# Altium PCB PCB1.PcbDoc
Units mm, origin at the board's own origin, x right, y up, seen from the top; angles counter-clockwise.
Board outline 32 x 32 mm, 4 copper layers (Top Layer, GND, POWER, Bottom Layer), stack 0.603 mm thick; 45 components, 36 nets, 190 pads, 105 vias.
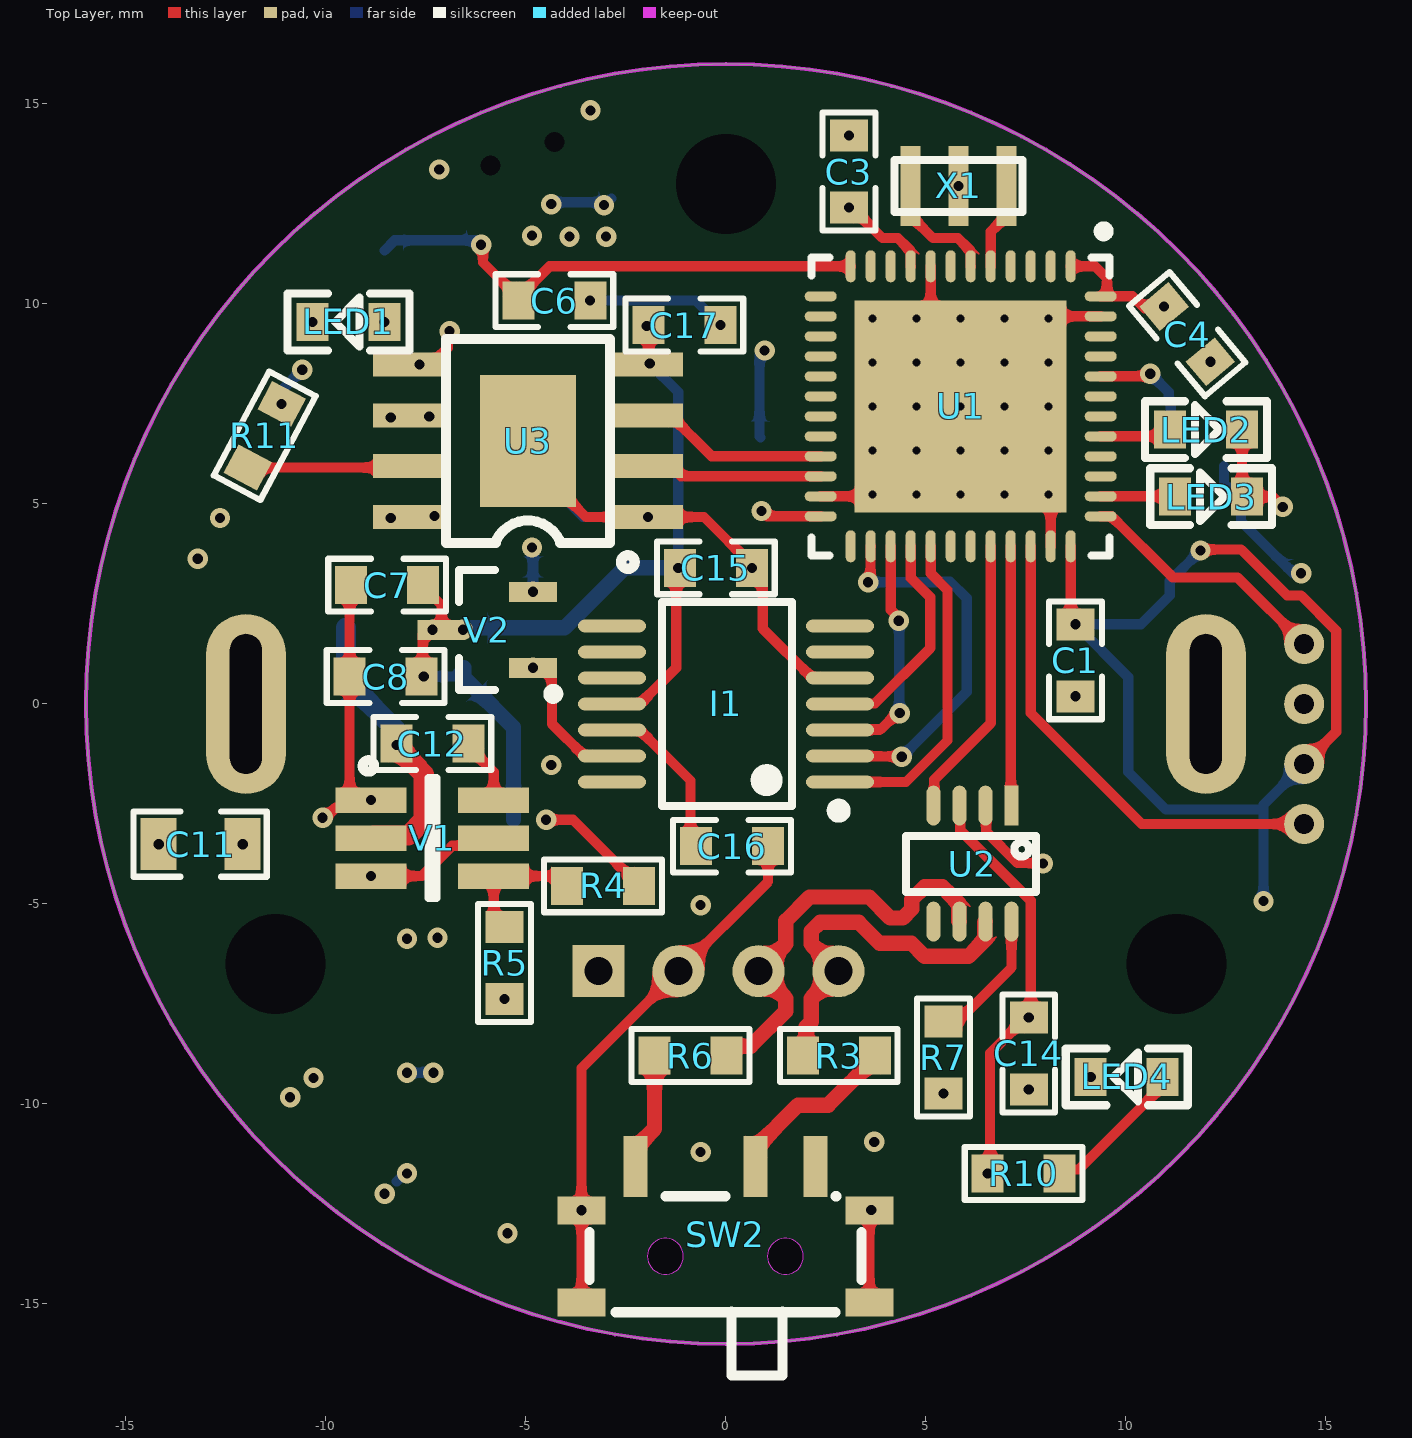
[diagram p0: Top Layer view]
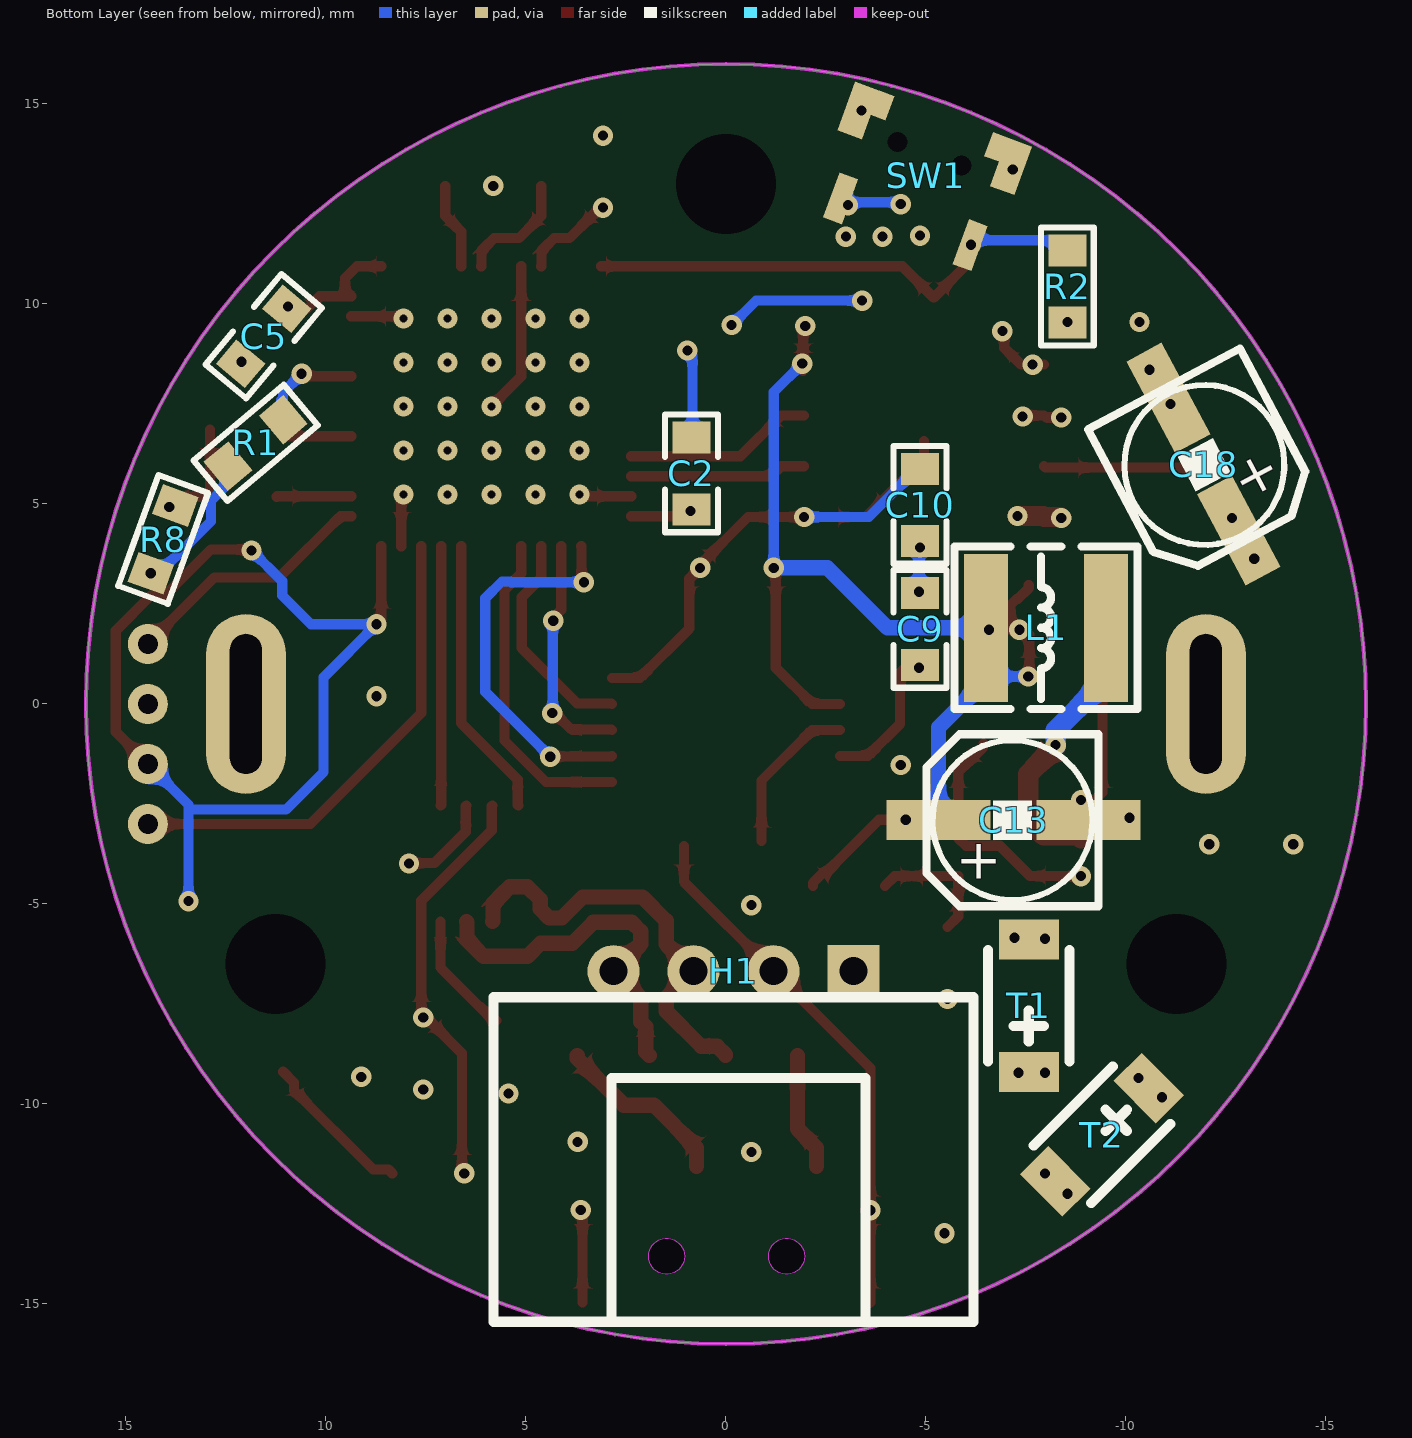
[diagram p1: Bottom Layer view, seen from below]
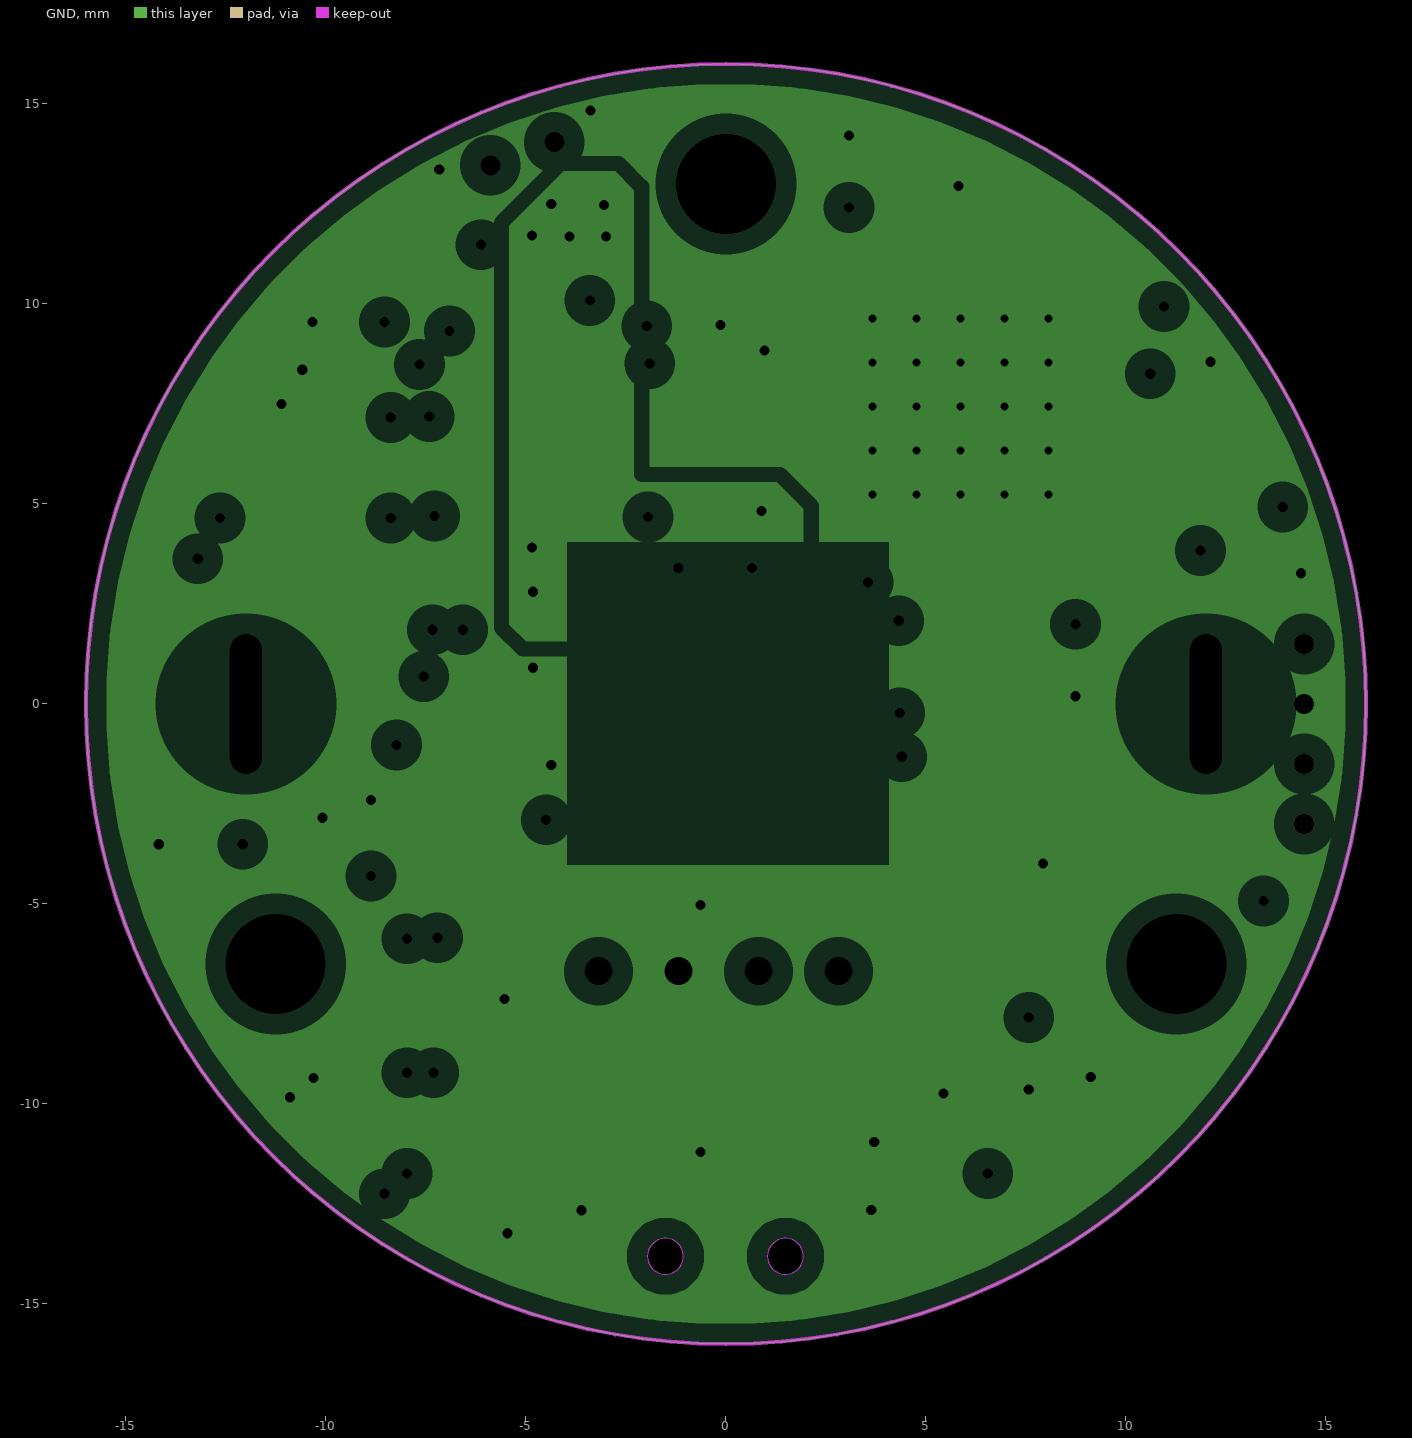
[diagram p2: GND, clearances drawn from the general rule]
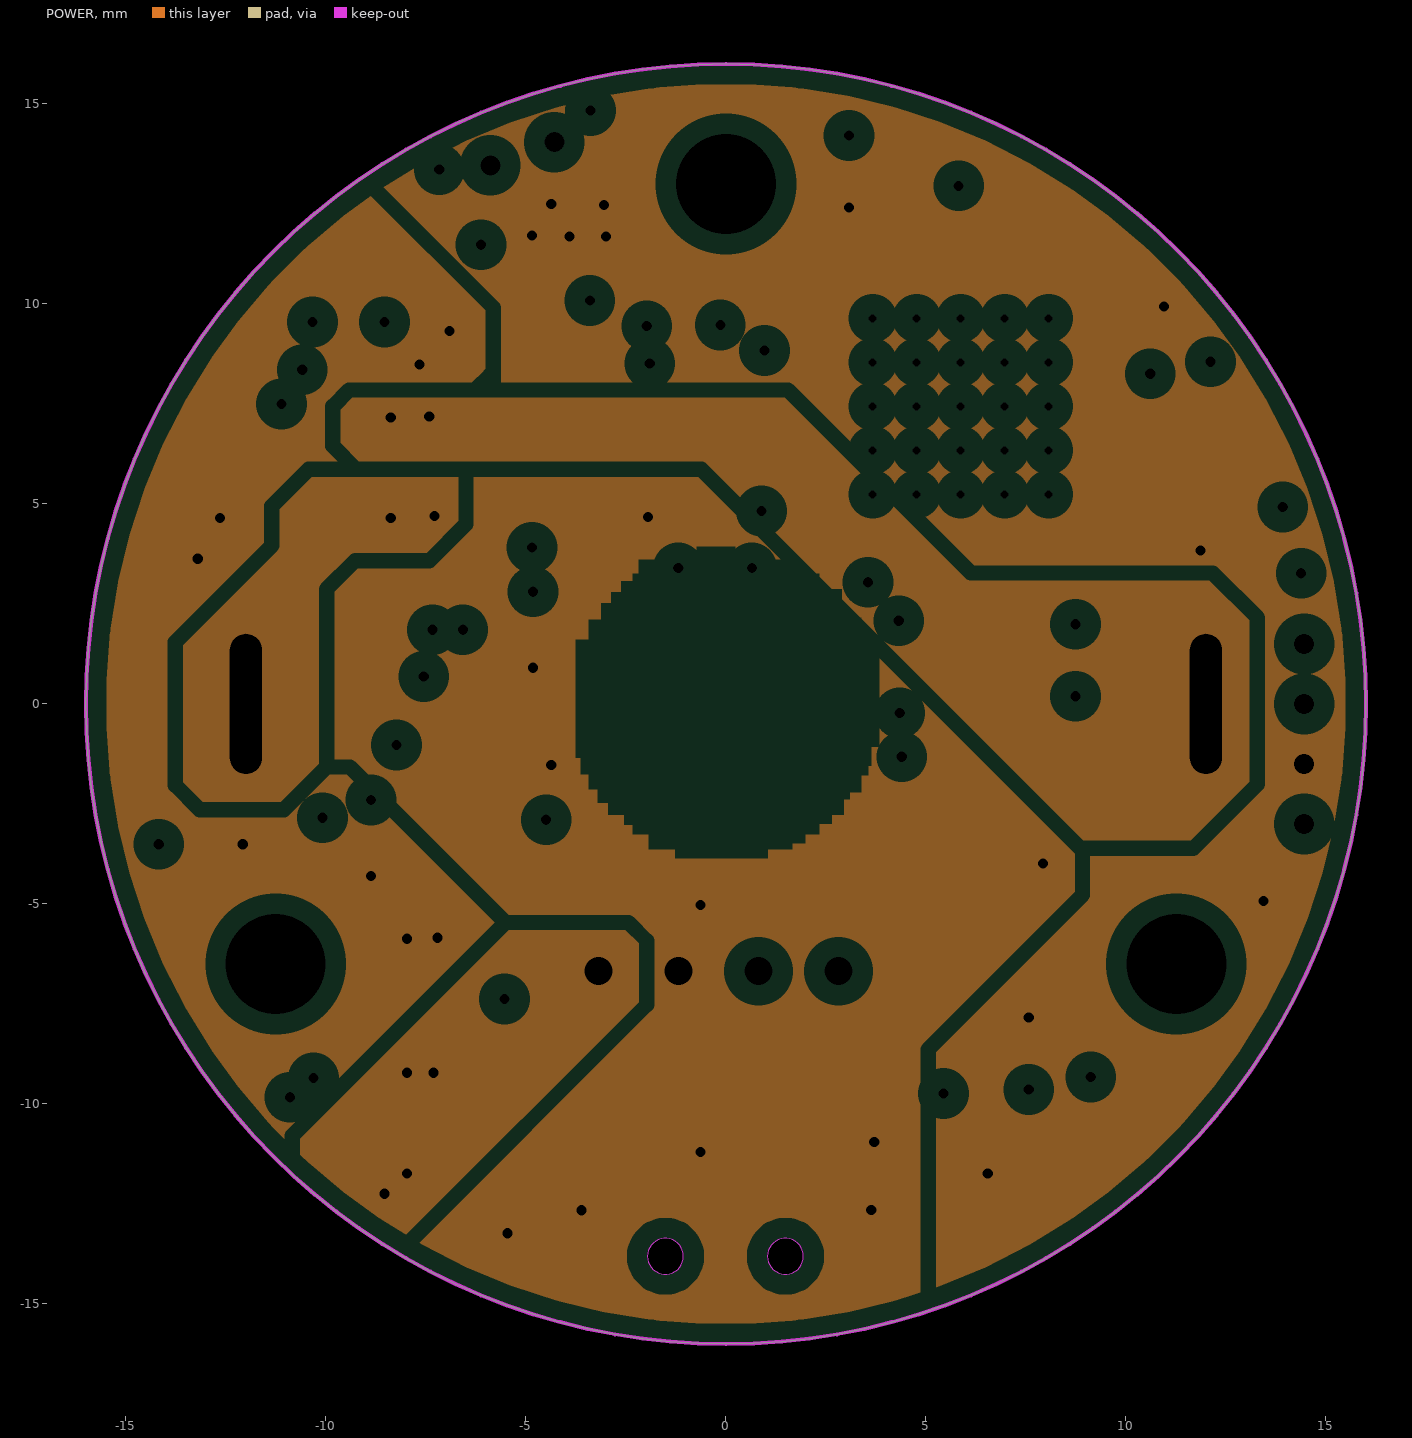
[diagram p3: POWER, clearances drawn from the general rule]
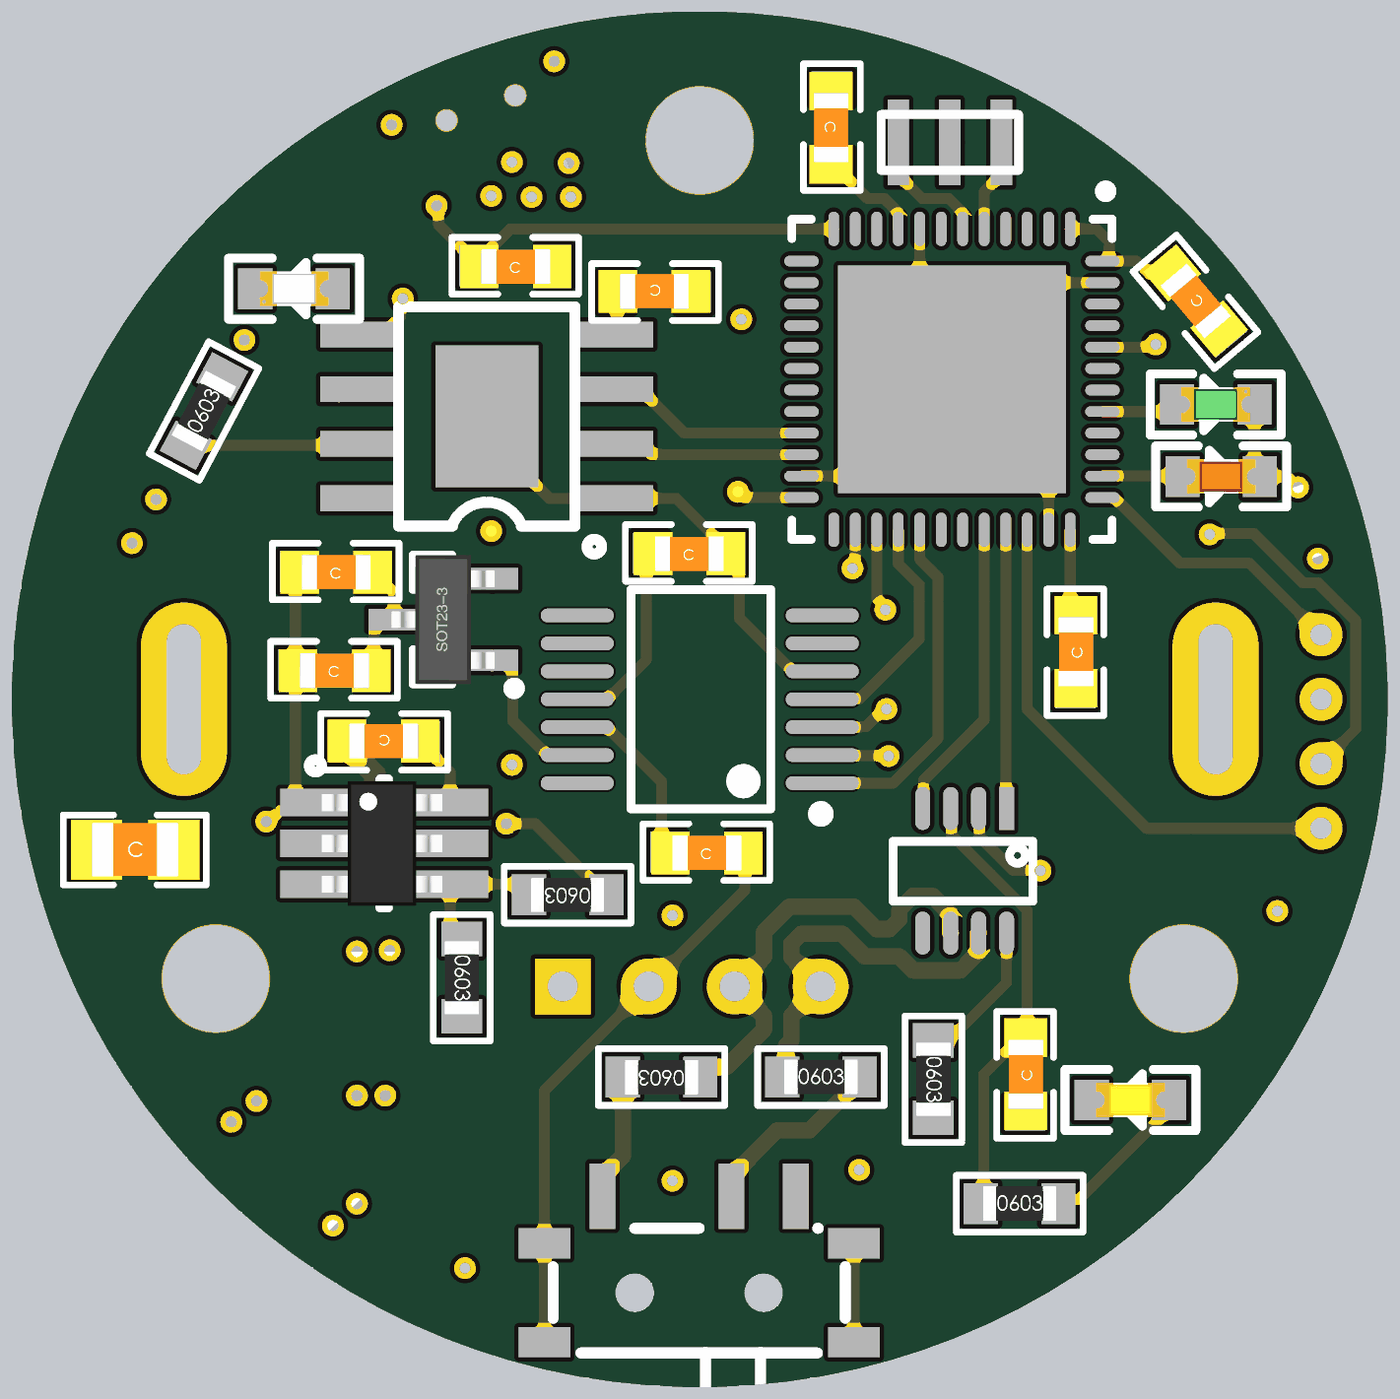
[diagram p4: 3D render of the assembled board from above, using the file's embedded part models]
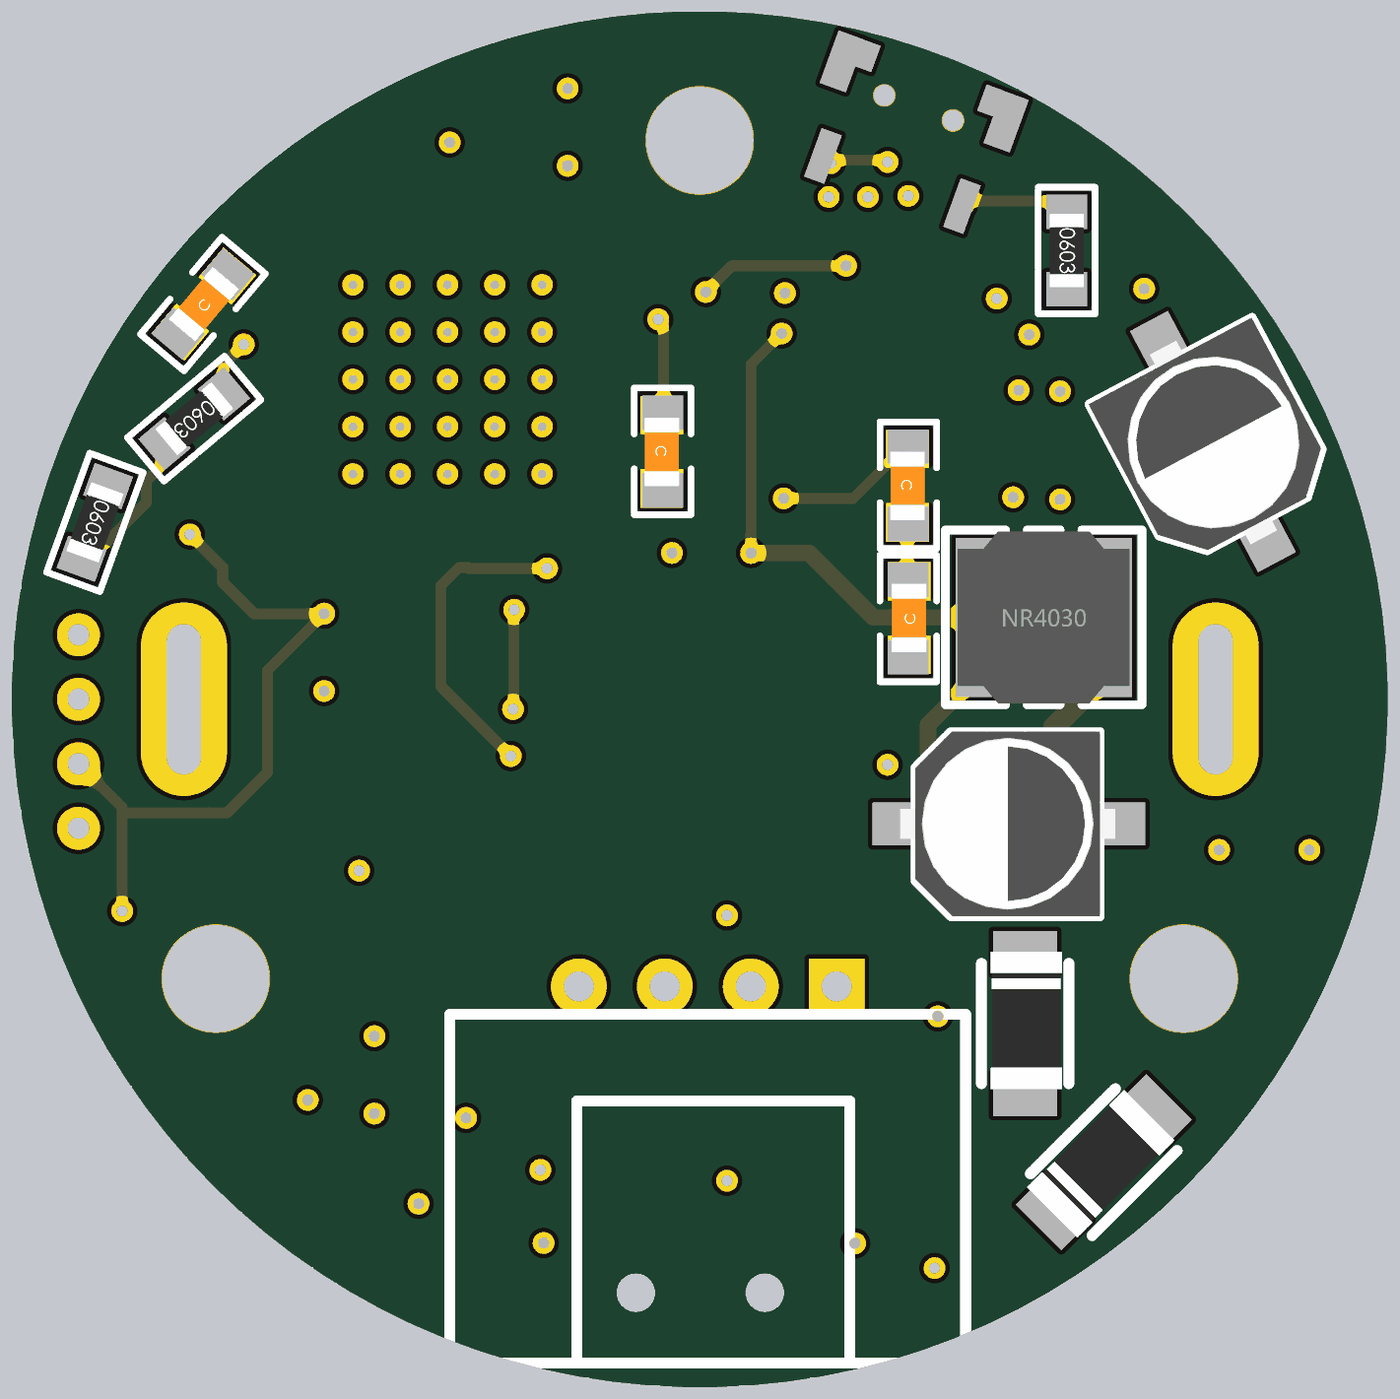
[diagram p5: 3D render of the assembled board from below, using the file's embedded part models]

## Layer stack, top to bottom
Top Solder: solder mask 0.0102, Solder Resist, Dk 3.5
Top Layer: signal copper 0.0356
Dielectric 2: prepreg 0.0711, PP-006, Dk 4.1
GND: plane copper 0.035, net GND
Dielectric 1: dielectric 0.32, FR-4, Dk 4.8
POWER: plane copper 0.035, net (Multiple Nets)
Dielectric 3: prepreg 0.0711, PP-006, Dk 4.1
Bottom Layer: signal copper 0.0356
Bottom Solder: solder mask 0.0102, Solder Resist, Dk 3.5

## Board outline
-16,0 ccw(c0,0) 0,-16 ccw(c0,0) 16,0 ccw(c0,0) 0,16 ccw(c0,0)

## Design rules (kind name [scope] priority, off if disabled: settings)
Clearance [All] p1: gap=0.178 ignorepadtopadclearanceinfootprint=TRUE
DiffPairsRouting [All] p1: maxlimit=0.254 minlimit=0.254 mostfreqgap=0.254 toplayer_minwidth=0.381 toplayer_maxwidth=0.381 toplayer_prefwidth=0.381 bottomlayer_minwidth=0.381 bottomlayer_maxwidth=0.381 bottomlayer_prefwidth=0.381 maxuncoupledlength=12.7
PlaneClearance [All] p1: clearance=0.508
PlaneConnect [All] p1: planeconnectstyle=Direct reliefexpansion=0.508 reliefentries=4 reliefconductorwidth=0.254 reliefairgap=0.254
PolygonConnect [All] p1: connectstyle=Direct reliefconductorwidth=0.254 reliefentries=4 polygonreliefangle="90 Angle" airgapwidth=0.254
RoutingVias [All] p1: holewidth=0.254 width=0.381 viastyle="Through Hole" minholewidth=0.254 minwidth=0.381 maxholewidth=0.711 maxwidth=1.27
SolderMaskExpansion [All] p1: expansion=0.102 istentingtop=FALSE
UnRoutedNet [All] p1: checkbadconnections=TRUE
Width [All] p1: maxlimit=1.27 minlimit=0.254 preferedwidth=0.254 minimp=50.000000 maximp=50.000000 favimp=50.000000
26 further rules are at their usual default settings.

## Classes and differential pairs
differential pair KEY: +KEY_P -KEY_N
differential pair CAN: +CAN_P -CAN_N

## Components (designator, comment, footprint, x,y, rotation, side; value= is the part's Value field where it differs from the comment)
C1 "104" C_0603 8.738,1.092 r90 top
C2 "104" C_0603 0.864,5.766 r270 bottom
C3 "104" C_0603 3.073,13.31 r270 top
C4 "104" C_0603 11.532,9.246 r130 top
C5 "104" C_0603 11.557,9.195 r130 bottom
C6 "104" C_0603 -4.293,10.084 r0 top
C7 "106" C_0603 -8.469,2.972 r0 top
C8 "104" C_0603 -8.509,0.686 r0 top
C9 "106" C_0603 -4.851,1.88 r90 bottom
C10 "104" C_0603 -4.851,4.978 r270 bottom
C11 "105" C_0805 -13.132,-3.505 r0 top
C12 "104" C_0603 -7.341,-0.991 r180 top
C13 "22U" SMD-EC-F4 -7.188,-2.896 r180 bottom
C14 "104" C_0603 7.569,-8.738 r90 top
C15 "104" C_0603 -0.254,3.404 r0 top
C16 "106" C_0603 0.152,-3.556 r0 top
C17 "104" C_0603 -1.041,9.474 r180 top
C18 "10U" SMD-EC-F4 -11.938,5.994 r62 bottom
H1 "HY2.0" HY2.0_4P_插弯 -3.187,-6.68 r0 bottom
I1 "AS5047" TSSOP14 0,0 r180 top locked
L1 "3.3U" NR4030 -8.001,1.905 r180 bottom
LED1 "Y_LED_W" Y_LED_0603_W -7.863,8.839 r180 top
LED2 "Y_LED_G" Y_LED_0603_G 10.428,7.569 r0 top
LED3 "Y_LED_R" Y_LED_0603_R 10.555,5.893 r0 top
LED4 "Y_LED_Y" Y_LED_0603_Y 11.593,-10.033 r180 top
R1 "10K" R_0603 11.76,6.528 r320 bottom
R2 "1K" R_0603 -8.534,10.439 r270 bottom
R3 "60R" R_0603 2.819,-8.788 r0 top
R4 "56.2K" R_0603 -3.073,-4.547 r180 top
R5 "10K" R_0603 -5.537,-6.477 r270 top
R6 "60R" R_0603 -0.889,-8.788 r180 top
R7 "24K" R_0603 5.436,-8.839 r270 top
R8 "5K" R_0603 14.072,4.115 r290 bottom
R10 "1K" R_0603 7.442,-11.735 r0 top
R11 "0.2R" R_0603 -11.532,6.706 r62 top
SW1 "2X4X3.5侧按键" 2X4X3.5贴片侧按开关 -6.298,17.743 r200 bottom
SW2 "MSK12C02" MSK12C02 -2.263,-11.557 r0 top
T1 "SS34" T_DIODE_SOD-123 -7.569,-9.195 r90 bottom
T2 "SS34" T_DIODE_SOD-123 -10.566,-9.601 r315 bottom
U1 "STM32F103CBU6" VFQFPN48_N 5.867,7.442 r270 top
U2 "MAX3051EKA" SOT23-8 7.137,-2.54 r270 top
U3 "AS4950" SOP8-EP -4.953,6.579 r180 top
V1 "TPS56320" SOT23-6 -7.214,-3.327 r0 top
V2 "XC6206P332MR" SOT23-3N -5.969,1.854 r90 top
X1 "8M" XTAL-3.2*1.3MM 5.817,12.954 r0 top

## Footprints (in the part's own frame and the unit in brackets; to place one, negate y for a bottom-side part, rotate by r counter-clockwise, add the part's x,y. Pads: shape width x height; smd on the part's side, far side on the other; paste and mask are expansions set on the pad)
2X4X3.5贴片侧按开关 [mm]
  rect 0.5x1.2 smd: 1(-1.48,-5.97) 2(1.96,-5.96)
  rect 0.65x1.3 smd: 3(-1.81,-3.75) 3(2.25,-3.76)
  rect 0.4x0.65 smd: 3(-1.29,-3.43) 3(1.73,-3.43)
  round 0.2 hole 0.5: 24(-0.62,-4.16) 25(1.08,-4.16)
  body extent 0.24,-5.57 0.24,-5.57, height 0.9
C_0603 [mm] "贴片无极性电容0603封装"
  rect 0.8x0.95 smd: 1(-0.9,0) 2(0.9,0)
  silkscreen extent -1.47,-0.66 1.47,0.66, body extent -1.29,-0.52 1.31,0.48, height 0.89
C_0805 [mm] "贴片无极性电容0805封装"
  rect 0.9x1.3 smd: 1(-1.05,0) 2(1.05,0)
  silkscreen extent -1.68,-0.81 1.65,0.81, body extent -1.5,-0.69 1.5,0.71, height 0.93
HY2.0_4P_插弯 [mm]
  rect 1.3x1.3 hole 0.7: 1(0,0)
  round 1.3 hole 0.7: 2(2,0) 3(4,0) 4(6,0)
  silkscreen extent -3,0.65 9,8.76
MSK12C02 [mm]
  rect 0.6x1.524 smd: 1(0,0) 2(3,0) 3(4.5,0)
  rect 1.2x0.7 smd: 4(-1.35,-3.4) 4(-1.35,-1.1) 4(5.85,-3.4) 4(5.85,-1.1)
  Keep-Out Layer board cut-out: 1.2,-2.25 1.156,-2.055 1.031,-1.898 0.85,-1.811 0.65,-1.811 0.469,-1.898 0.345,-2.055 0.3,-2.25 0.3,-2.25 0.345,-2.445 0.469,-2.602 0.65,-2.689 0.85,-2.689 1.031,-2.602 1.156,-2.445 1.2,-2.25
  Keep-Out Layer board cut-out: 4.2,-2.25 4.156,-2.055 4.031,-1.898 3.85,-1.811 3.65,-1.811 3.469,-1.898 3.345,-2.055 3.3,-2.25 3.3,-2.25 3.345,-2.445 3.469,-2.602 3.65,-2.689 3.85,-2.689 4.031,-2.602 4.156,-2.445 4.2,-2.25
  Multi-Layer pour cut-out: 1.2,-2.25 1.156,-2.055 1.031,-1.898 0.85,-1.811 0.65,-1.811 0.469,-1.898 0.345,-2.055 0.3,-2.25 0.3,-2.25 0.345,-2.445 0.469,-2.602 0.65,-2.689 0.85,-2.689 1.031,-2.602 1.156,-2.445 1.2,-2.25
  Multi-Layer pour cut-out: 4.2,-2.25 4.156,-2.055 4.031,-1.898 3.85,-1.811 3.65,-1.811 3.469,-1.898 3.345,-2.055 3.3,-2.25 3.3,-2.25 3.345,-2.445 3.469,-2.602 3.65,-2.689 3.85,-2.689 4.031,-2.602 4.156,-2.445 4.2,-2.25
  silkscreen extent -1.15,-5.23 5.65,-0.75
NR4030 [mm] "4.0mm*4.0mm*3.0mm(长*宽*高）"
  rect 1.1x3.7 smd: 1(-1.5,0) 2(1.5,0)
  silkscreen extent -2.29,-2.03 2.29,2.03, body extent -2,-2 2,2, height 3.1
R_0603 [mm] "贴片电阻0603封装"
  rect 0.8x0.95 smd: 1(-0.9,0) 2(0.9,0)
  silkscreen extent -1.47,-0.66 1.47,0.66, body extent -0.85,-0.4 0.85,0.4, height 0.53
SMD-EC-F4 [mm]
  rect 2.6x1 smd: 1(-1.877,0) 2(1.877,0)
  silkscreen extent -2.18,-2.16 2.12,2.14, body extent -2.52,-2.15 2.48,2.15, height 5.5
SOP8-EP [mm]
  rect 1.75x0.6 smd: 1(-3,1.905) 2(-3,0.635) 3(-3,-0.635) 4(-3,-1.905) 5(3,-1.905) 6(3,-0.635) 7(3,0.635) 8(3,1.905)
  rect 2.4x3.3 smd: 9(0,0)
  silkscreen extent -2.67,-2.55 2.05,3.2
SOT23-3N [mm]
  rect 0.5x1.2 smd: 1(-0.95,-1.143) 2(0.95,-1.143) 3(0,1.143)
  silkscreen extent -1.72,-1.78 1.5,0.7, body extent -1.5,-1.2 1.5,1.2, height 1.05
SOT23-6 [mil]
  rect 70x25 smd: 1(-65.35,36.4) 2(-65.35,-1) 3(-65.35,-38.4) 4(55.35,-38.4) 5(55.35,-1) 6(55.35,36.4)
  silkscreen extent -74,-60 -1,76, body extent -62,-58 48,56, height 57
SOT23-8 [mm]
  rect 1x0.35 smd: 1(0,0)
  oval 1x0.35 smd: 2(0,-0.65) 3(0,-1.3) 4(0,-1.95) 5(2.9,-1.95) 6(2.9,-1.3) 7(2.9,-0.65) 8(2.9,0)
  silkscreen extent 0.76,-2.64 2.16,0.61
T_DIODE_SOD-123 [mm] "贴片二极管SOD-123封装"
  rect 1x1.5 smd: 1(0,0) 2(3.302,0)
  silkscreen extent 0.25,-1.02 3.05,1.02, body extent 0.13,-0.86 3.33,0.8, height 0.53
TSSOP14 [mm]
  oval 1.7x0.32 smd paste+0 mask+0.05: 1(-2.85,1.95) 2(-2.85,1.3) 3(-2.85,0.65) 4(-2.85,0) 5(-2.85,-0.65) 6(-2.85,-1.3) 7(-2.85,-1.95) 8(2.85,-1.95) 9(2.85,-1.3) 10(2.85,-0.65) 11(2.85,0) 12(2.85,0.65) 13(2.85,1.3) 14(2.85,1.95)
  silkscreen extent -2.97,-2.55 1.6,2.82
VFQFPN48_N [mm] "QFN, 48-Leads, Body 7x7mm, Pitch 0.5mm, Thermal Pad 5.3x5.3mm, IPC Medium Density"
  oval 0.8x0.25 smd: 1(-3.5,2.75) 2(-3.5,2.25) 3(-3.5,1.75) 4(-3.5,1.25) 5(-3.5,0.75) 6(-3.5,0.25) 7(-3.5,-0.25) 8(-3.5,-0.75) 9(-3.5,-1.25) 10(-3.5,-1.75) 11(-3.5,-2.25) 12(-3.5,-2.75) 25(3.5,-2.75) 26(3.5,-2.25) 27(3.5,-1.75) 28(3.5,-1.25) 29(3.5,-0.75) 30(3.5,-0.25) 31(3.5,0.25) 32(3.5,0.75) 33(3.5,1.25) 34(3.5,1.75) 35(3.5,2.25) 36(3.5,2.75)
  oval 0.25x0.8 smd: 13(-2.75,-3.5) 14(-2.25,-3.5) 15(-1.75,-3.5) 16(-1.25,-3.5) 17(-0.75,-3.5) 18(-0.25,-3.5) 19(0.25,-3.5) 20(0.75,-3.5) 21(1.25,-3.5) 22(1.75,-3.5) 23(2.25,-3.5) 24(2.75,-3.5) 37(2.75,3.5) 38(2.25,3.5) 39(1.75,3.5) 40(1.25,3.5) 41(0.75,3.5) 42(0.25,3.5) 43(-0.25,3.5) 44(-0.75,3.5) 45(-1.25,3.5) 46(-1.75,3.5) 47(-2.25,3.5) 48(-2.75,3.5)
  rect 5.3x5.3 smd: 49(0,0)
  silkscreen extent -4.5,-3.72 3.72,3.73, body extent -3.58,-3.57 3.57,3.58, height 1
XTAL-3.2*1.3MM [mm]
  rect 0.5x2 smd: 1(-1.2,0) 2(0,0) 3(1.2,0)
  silkscreen extent -1.6,-0.65 1.6,0.65
Y_LED_0603_G [mm] "绿色贴片0603LED"
  rect 0.8x0.95 smd: 1(0.675,-0.711) 2(2.475,-0.711)
  silkscreen extent 0.05,-1.42 3.1,0, body extent 0.77,-1.11 2.37,-0.31, height 0.6
Y_LED_0603_R [mm] "红色贴片0603LED"
  rect 0.8x0.95 smd: 1(0.675,-0.711) 2(2.475,-0.711)
  silkscreen extent 0.05,-1.42 3.1,0, body extent 0.77,-1.11 2.37,-0.31, height 0.6
Y_LED_0603_W [mm] "白色贴片0603LED"
  rect 0.8x0.95 smd: 1(0.675,-0.711) 2(2.475,-0.711)
  silkscreen extent 0.05,-1.42 3.1,0, body extent 0.77,-1.11 2.37,-0.31, height 0.6
Y_LED_0603_Y [mm] "黄色贴片0603LED"
  rect 0.8x0.95 smd: 1(0.675,-0.711) 2(2.475,-0.711)
  silkscreen extent 0.05,-1.42 3.1,0, body extent 0.77,-1.11 2.37,-0.31, height 0.6

## Part data
C1 C2 C3 C4 C5 C6 C7 C8 C9 C10 C11 C12 C14 C15 C16 C17: library part C_无极贴片, "无极性贴片电容"
C13 C18: library part C_贴片电解, "贴片电解电容"
H1: library part HY2.0_4P
I1: "磁编码器芯片"
L1: library part L_贴片功率, "贴片屏蔽式功率电感"
LED1: "白色LED"
LED2: "绿色LED"
LED3: "红色LED"
LED4: "黄色LED"
R1 R2 R3 R4 R5 R6 R7 R8 R10 R11: library part R_贴片, "贴片电阻"
SW2: "单刀双掷开关，卧贴，额定电流：50mA，额定电压：12V"
T1 T2: library part T_Sch_Diode_SSXX, "SSXX系列肖特基二极管", LatestRevisionDate=17-Jul-2002, LatestRevisionNote="Re-released for DXP Platform.", Publisher="Altium Limited"
U1: "STM32 ARM-based 32-bit MCU Performance Line with 128 kB Flash, 20 kB Internal RAM, -40 to +85癈 Temperature, 48-Pin VFQFPN, Tray", ComponentLink1Description="Manufacturer URL", ComponentLink1URL=http://www.st.com/, ComponentLink2Description="STM32F103 Datasheet", ComponentLink2URL=http://www.st.com/internet/com/TECHNICAL_RESOURCES/TECHNICAL_LITERATURE/DATASHEET/CD00161566.pdf, ComponentLink3Description="STM32 Family Web Page", ComponentLink3URL=www.st.com/stm32, DatasheetVersion="rev13.0, Apr-2011", PackageDescription="48-Pin Quad Flat No-Lead, 7 x 7 x 0.9 mm Body, 0.5 mm Pitch, Exposed Pad", PackageReference=VFQFPN48, PackageVersion=2011
U2: "CAN-1Mbps"
U3: "直流电机驱动，3A"
V1: "小封装3A开关电源"
V2: "低压差线性稳压芯片", BOM名称=低压差线性稳压芯片, 学习资源=www.ooocke.com, 版权归属=源创客
X1: library part XTAL-3213-3P, "8~20M-3.2*1.3mm-3P"

## Free pads (board coordinates)
  oval 2x4.5 hole 3.5 slot 0.8 at 0 deg: 8(-12,0) 9(12,0)
  round 2 hole 2.5: 10(0,13) 11(-11.26,-6.5) 12(11.26,-6.5)
  round 1 hole 0.5: 13(14.453,-3.001) 17(14.453,-1.501) 18(14.453,-0.001) 19(14.453,1.499)

## Via types
v1: diameter 0.508, hole 0.254, Top Layer to Bottom Layer, 80 vias
v2: diameter 0.5, hole 0.2, Top Layer to Bottom Layer, 25 vias

## Nets (pads, with @x,y where several pads share a name; then routed paths per layer and width w, separated by ;. In a path a pad name is that pad's centre, name@x,y a point inside that pad or via, vN(x,y) a via of type N, cw(c..) or ccw(c..) an arc to the next point about the centre after c; other vN are vias at no path point)
3V3: C1.2 C2.2 C3.2 C4.2 C5.2 C9.2 C10.2 C14.2 pad.17 R10.1 SW1.1 U1.1 U1.9 U1.24 U1.36 U1.48 U2.3 V2.2 | length 46.1
  Top Layer w0.254: v1(0.889,4.826) 1.023,4.692 U1.24 ; v1(3.073,12.41) 3.148,12.41 3.909,11.649 4.293,11.649 4.615,11.327 4.615,10.944 U1.9 ; U2.3 5.856,-2.558 5.856,-3.155 7.617,-4.916 7.617,-7.79 v1(7.569,-7.838) 7.494,-7.838 6.604,-8.728 6.604,-11.673 v1(6.542,-11.735) ; U1.36 8.617,2.112 v1(8.738,1.992) ; U1.1 9.225,10.942 9.525,10.643 9.525,10.287 9.449,10.211 U1.48@9.467,10.192 ; U1.48 U1.48@9.467,10.192 ; v1(10.953,9.935) 10.905,9.887 10.462,9.887 10.157,10.192 U1.48@9.467,10.192 ; v1(11.862,3.835) 11.887,3.861 12.878,3.861 14.028,2.71 14.379,2.71 15.257,1.832 15.257,-0.697 pad.17
  Bottom Layer w0.254: v1(-4.851,3.912) -4.826,3.886 v1(-4.826,2.804) ; v1(-4.369,12.497) -4.32,12.545 -2.959,12.545 SW1.1 ; v1(11.862,3.835) 11.094,3.067 11.094,2.712 10.374,1.992 v1(8.738,1.992) 10.058,0.671 10.058,-1.702 10.998,-2.642 13.437,-2.642 ; v1(13.437,-4.928) 13.437,-2.517 pad.17@14.43,-1.524
  other v1: -3.912,11.684 -2.997,11.684 -4.851,11.709 -3.048,12.471
5V: C7.2 C8.2 C13.1 C15.1 C17.2 I1.11 L1.1 R4.1 U3.4 V2.3 | length 28.3
  Top Layer w0.254: C8.2 -7.585,0.71 -7.585,1.731 -7.462,1.854 V2.3 -7.112,2.475 -7.261,2.624 -7.296,2.624 -7.569,2.897 C7.2 ; v1(-4.496,-2.896) -3.824,-2.896 -2.521,-4.199 -2.446,-4.199 -2.173,-4.472 R4.1 ; I1.11 -2.153,0 -1.245,0.908 C15.1@-1.245,3.404 ; C17.2 -1.928,9.46 U3.4@-1.928,8.331
  Bottom Layer w0.254: v1(-7.556,0.689) -6.778,0.689 L1.1@-6.553,0.914 ; v1(-1.905,8.509) -1.194,7.798 v1(-1.194,3.404)
  Bottom Layer w0.381: L1.1@-6.553,0.914 -6.553,0.657 -5.312,-0.584 C13.1 ; L1.1 -4.039,1.905 -2.54,3.404 v1(-1.194,3.404)
  other v1: -7.335,1.854 -6.579,1.854 -1.981,9.449
12V: C11.2 C18.1 T1.2 U3.5 V1.3 V1.5 | length 5.1
  Top Layer w0.254: v1(-8.874,-4.303) -7.604,-4.303 -6.844,-3.543 -5.998,-3.543 V1.5 ; U3.5 -7.378,8.484 -6.957,8.904 -6.957,9.273 v1(-6.909,9.322)
  other v1: -7.976,-5.867 -7.214,-5.842 -12.082,-3.505 -13.208,3.632 -12.649,4.648 -7.665,8.484
CAN_N: H1.3 R6.1 U2.6 | length 10.7
  Top Layer w0.381: R6.1 0.011,-8.766 0.221,-8.556 0.618,-8.556 1.495,-7.679 1.495,-7.363 H1.3 1.495,-5.998 1.495,-5.419 2.09,-4.824 3.582,-4.824 4.105,-5.347 4.421,-5.347 4.644,-5.124 4.644,-4.89 4.962,-4.572 5.412,-4.572 5.822,-4.981 5.822,-5.425 U2.6
CAN_P: H1.4 R3.1 U2.7 | length 9.2
  Top Layer w0.381: R3.1 2.006,-8.702 2.006,-8.066 2.13,-7.942 2.13,-7.363 H1.4 2.13,-5.998 2.13,-5.682 2.353,-5.459 3.319,-5.459 3.842,-5.982 4.636,-5.982 4.962,-6.308 6.062,-6.308 6.472,-5.899 6.472,-5.455 U2.7
CANRX: U1.32 U2.4 | length 7.1
  Top Layer w0.254: U2.4 5.206,-2.522 5.206,-1.89 6.617,-0.479 U1.32
CANTX: U1.33 U2.1 | length 6.5
  Top Layer w0.254: U1.33 7.119,3.94 7.119,-2.522 U2.1
CLK: pad.19 U1.37 | length 6.4
  Top Layer w0.254: U1.37 9.638,4.692 11.165,3.166 12.785,3.166 pad.19
DIO: pad.13 U1.34 | length 12.2
  Top Layer w0.254: U1.34 7.617,-0.226 10.393,-3.001 pad.13
ERRLED: LED3.1 U1.38 | length 1.9
  Top Layer w0.254: U1.38 11.22,5.192 LED3.1
GND: C1.1 C2.1 C3.1 C4.1 C5.1 C6.2 C7.1 C8.1 C9.1 C10.1 C11.1 C13.2 C14.1 C15.2 C16.2 C17.1 C18.2 H1.2 I1.5 I1.13 LED1.2 LED4.2 pad.18 R1.2 R5.2 R7.2 R8.2 R11.2 SW1.3 SW2.4 T2.1 U1.8 U1.23 U1.35 U1.47 U1.49 U2.2 U3.1 U3.9 V1.1 V2.1 X1.2 | length 61.6
  Top Layer w0.254: v1(-10.084,-2.845) -10.015,-2.845 -9.764,-2.593 -9.064,-2.593 v1(-8.874,-2.403) -9.219,-2.403 -9.409,-2.212 C8.1 -9.409,2.932 C7.1 ; U3.9 -4.953,6.129 -3.498,4.674 v1(-1.953,4.674) -0.549,4.674 0.646,3.479 v1(0.646,3.404) 0.919,3.131 0.919,1.884 2.153,0.65 I1.5 ; v1(-4.826,0.904) -4.476,0.904 -4.353,0.781 -4.353,-0.494 -3.547,-1.3 I1.13 ; SW2.4@-3.613,-14.957 v1(-3.613,-12.657) -3.613,-9.106 H1.2 1.052,-4.441 C16.2 ; U1.23 3.617,5.192 v2(3.667,5.242) ; SW2.4@3.586,-14.957 SW2.4@3.586,-12.657 ; U1.8 5.117,8.192 v2(5.867,7.442) ; U2.2 6.506,-2.558 6.506,-3.194 7.29,-3.978 7.915,-3.978 v1(7.925,-3.988) ; v2(8.067,5.242) 8.117,5.192 U1.35 ; v2(8.067,9.642) 8.117,9.692 U1.47
  Bottom Layer w0.254: C18.2 -11.057,7.891 v1(-10.592,8.357) ; C10.1 -4.776,5.878 -3.572,4.674 v1(-1.953,4.674) ; v1(-3.404,10.084) -0.751,10.084 v1(-0.141,9.474) ; C2.1 0.838,6.691 0.838,8.643 0.965,8.77 v1(0.965,8.839) ; R1.2 12.45,5.509 12.876,5.083 12.876,4.57 14.176,3.269 v1(14.379,3.269)
  other v1: -5.461,-13.233 3.632,-12.649 -0.635,-11.201 3.708,-10.947 -10.897,-9.83 5.436,-9.739 7.569,-9.638 -10.312,-9.347 9.119,-9.322 -5.537,-7.377 -0.635,-5.029 -14.182,-3.505 -4.369,-1.524 8.738,0.192 -11.109,7.5 12.11,8.556 -10.338,9.55 5.817,12.954 -7.168,13.361 3.073,14.21 -3.387,14.84
  other v2: 4.767,5.242 5.867,5.242 6.967,5.242 3.667,6.342 4.767,6.342 5.867,6.342 6.967,6.342 8.067,6.342 3.667,7.442 4.767,7.442 6.967,7.442 8.067,7.442 3.667,8.542 4.767,8.542 5.867,8.542 6.967,8.542 8.067,8.542 3.667,9.642 4.767,9.642 5.867,9.642 6.967,9.642
IDLED: LED2.1 U1.41 | length 1.8
  Top Layer w0.254: U1.41 10.937,6.692 LED2.1
IN1: U1.21 U3.3 | length 4.7
  Top Layer w0.254: U3.3 -1.378,7.214 -0.357,6.192 U1.21
IN2: U1.22 U3.2 | length 4.4
  Top Layer w0.254: U3.2 -1.378,5.944 -1.127,5.692 U1.22
KEY: C6.1 R2.1 SW1.2 U1.12 | length 12.9
  Top Layer w0.254: v1(-6.121,11.481) -6.073,11.432 -6.073,11.039 -5.193,10.159 -4.409,10.942 U1.12
  Bottom Layer w0.254: R2.1 -8.282,11.592 -6.233,11.592 v1(-6.121,11.481) -6.113,11.472 SW1.2
KEY_N: R6.2 SW2.1 | length 3
  Top Layer w0.381: SW2.1 -2.263,-11.095 -1.789,-10.621 R6.2
KEY_P: R3.2 SW2.2 | length 4.4
  Top Layer w0.381: SW2.2 0.737,-11.095 1.802,-10.029 2.554,-10.029 3.719,-8.863 R3.2
MISO: I1.3 U1.27 | length 5.9
  Top Layer w0.254: I1.3 2.863,-0.637 3.866,-0.637 4.275,-0.229 v1(4.343,-0.229) ; U1.27 4.117,2.352 4.318,2.152 v1(4.318,2.083)
  Bottom Layer w0.254: v1(4.318,2.083) 4.331,2.07 4.331,-0.216 v1(4.343,-0.229)
MOSI: I1.4 U1.28 | length 5.6
  Top Layer w0.254: I1.4 2.863,0.013 3.721,0.013 5.105,1.397 5.105,2.667 4.617,3.155 U1.28
NetC12_1: C12.1 V1.6 | length 1.7
  Top Layer w0.254: C12.1 -6.441,-1.066 -5.808,-1.699 V1.6
NetC16_1: C16.1 I1.12 | length 4
  Top Layer w0.254: I1.12 -2.153,-0.65 -0.889,-1.914 C16.1@-0.889,-3.429
NetLED1_1: LED1.1 R2.2
  other v1: -8.538,9.55
NetLED2_2: LED2.2 LED3.2 R8.1 | length 2.7
  Top Layer w0.254: LED2.2 12.903,5.309 LED3.2 13.665,5.182 v1(13.919,4.928)
NetLED4_1: LED4.1 R10.2 | length 3.9
  Top Layer w0.254: R10.2 8.443,-11.634 8.825,-11.634 10.798,-9.661 10.798,-9.468 LED4.1@11.071,-9.195
NetR1_1: R1.1 U1.44 | length 2.6
  Top Layer w0.254: U1.44 10.477,8.192 10.54,8.255 v1(10.608,8.255)
  Bottom Layer w0.254: v1(10.608,8.255) 11.071,7.792 11.071,7.645 11.119,7.597 11.119,7.155 R1.1
NetR7_1: R7.1 U2.8 | length 3.1
  Top Layer w0.254: R7.1@5.74,-7.914 5.815,-7.914 7.137,-6.592 U2.8
NetR11_1: R11.1 U3.7 | length 4
  Top Layer w0.254: R11.1 R11.1 -7.987,5.91 U3.7
NetU1_5: U1.5 X1.3 | length 2.2
  Top Layer w0.254: U1.5 6.617,11.805 7.017,12.204 X1.3
NetU1_6: U1.6 X1.1 | length 3
  Top Layer w0.254: X1.1 4.617,12.204 5.171,11.649 5.793,11.649 6.115,11.327 6.115,10.944 U1.6
OUT1: pad.9 U3.6 | length 1
  Top Layer w0.254: v1(-8.382,7.163) -8.004,7.163 U3.6 -7.442,7.214 v1(-7.417,7.188)
OUT2: pad.8 U3.8 | length 1.1
  Top Layer w0.508: v1(-8.382,4.648) -8.357,4.674 U3.8 -7.928,4.699 v1(-7.29,4.699)
SPICLK: I1.2 U1.26 | length 9.8
  Top Layer w0.254: I1.2 2.86,-1.31 4.384,-1.31 v1(4.394,-1.321) ; v1(3.553,3.045) 3.553,3.113 3.615,3.176 3.615,3.94 U1.26
  Bottom Layer w0.254: v1(3.553,3.045) 4.491,3.045 5.371,3.045 5.391,3.064 5.601,3.064 6.02,2.645 6.02,0.305 v1(4.394,-1.321)
SPICS: I1.1 U1.29 | length 8.1
  Top Layer w0.254: I1.1 4.502,-1.95 5.537,-0.914 5.537,2.846 5.117,3.266 U1.29
SW: C12.2 L1.2 V1.2 | length 7.2
  Top Layer w0.508: V1.2 -8.81,-3.289 -7.943,-3.289 -7.553,-2.899 -7.553,-1.753 -8.241,-1.066 v1(-8.241,-1.028) C12.2
  Bottom Layer w0.508: L1.2 -9.501,0.605 -8.241,-0.655 v1(-8.241,-1.028)
VBAT: H1.1 T1.1 T2.2 | length 0.8
  Bottom Layer w0.254: T2.2 -8.03,-11.735 v1(-7.976,-11.735) ; v1(-7.976,-9.22) -7.595,-9.22 T1.1
  other v1: -8.534,-12.243 -7.315,-9.22
VFB: R4.2 R5.1 V1.4 | length 3.3
  Top Layer w0.254: R5.1 -5.808,-5.307 V1.4 -4.217,-4.303 R4.2
pads on no net: I1.6 I1.7 I1.8 I1.9 I1.10 I1.14 SW1.24 SW1.25 SW2.3 U1.2 U1.3 U1.4 U1.7 U1.10 U1.11 U1.13 U1.14 U1.15 U1.16 U1.17 U1.18 U1.19 U1.20 U1.25 U1.30 U1.31 U1.39 U1.40 U1.42 U1.43 U1.45 U1.46 U2.5

## Polygon pours and split planes (outlines as drawn)
3V3 on GND (split plane): -2.3,12.849 -2.3,11.811 -2.3,5.74 -2.294,5.691 -2.275,5.644 -2.244,5.605 -2.204,5.574 -2.158,5.555 -2.108,5.548 1.267,5.548 1.941,4.873 1.941,4.039 -3.962,4.039 -3.962,1.564 -5,1.564 -5.421,1.985 -5.421,4.902 -5.421,11.96 -4.639,12.742 -4.061,13.321 -2.772,13.321
GND on GND (split plane): 1.822,15.394 3.024,15.204 4.208,14.919 5.365,14.543 6.49,14.078 7.574,13.525 8.612,12.889 9.597,12.174 10.522,11.383 11.383,10.522 12.174,9.597 12.889,8.612 13.525,7.574 14.078,6.49 14.543,5.365 14.919,4.208 15.204,3.024 15.394,1.822 15.49,0.609 15.49,0 15.49,-0.609 15.394,-1.822 15.204,-3.024 14.919,-4.208 14.543,-5.365 14.078,-6.49 13.525,-7.574 12.889,-8.612 12.174,-9.597 11.383,-10.522 10.522,-11.383 9.597,-12.174 8.612,-12.889 7.574,-13.525 6.49,-14.078 5.365,-14.543 4.208,-14.92 3.024,-15.204 1.822,-15.394 0.609,-15.49 -0.609,-15.49 -1.822,-15.394 -3.024,-15.204 -4.208,-14.92 -5.365,-14.543 -6.49,-14.078 -7.574,-13.525 -8.612,-12.889 -9.597,-12.174 -10.522,-11.383 -11.383,-10.522 -12.174,-9.597 -12.889,-8.612 -13.525,-7.574 -14.078,-6.49 -14.543,-5.365 -14.92,-4.208 -15.204,-3.024 -15.394,-1.822 -15.49,-0.609 -15.49,0 -15.49,0.609 -15.394,1.822 -15.204,3.024 -14.92,4.208 -14.543,5.365 -14.078,6.49 -13.525,7.574 -12.889,8.612 -12.174,9.597 -11.383,10.522 -10.522,11.383 -9.597,12.174 -8.612,12.889 -7.574,13.525 -6.49,14.078 -5.365,14.543 -4.208,14.919 -3.024,15.204 -1.822,15.394 -0.609,15.49 0.609,15.49
OUT1 on POWER (split plane): 5.986,3.141 6.025,3.11 6.072,3.091 6.121,3.084 12.087,3.084 13.092,2.079 13.092,-1.927 11.604,-3.415 8.944,-3.415 3.835,1.694 3.835,1.727 3.802,1.727 3.378,2.151 3.378,2.159 3.371,2.159 2.896,2.634 2.896,2.87 2.659,2.87 2.337,3.193 2.337,3.251 2.278,3.251 -0.474,6.003 -0.514,6.034 -0.533,6.042 -0.56,6.053 -0.61,6.06 -9.166,6.06 -9.638,6.531 -9.638,7.363 -9.344,7.656 -8.915,7.656 1.47,7.656
OUT1 on POWER (split plane): 1.735,3.251 1.727,3.251 1.727,3.259
3V3 on POWER (split plane): 1.822,15.394 3.024,15.204 4.208,14.919 5.365,14.543 6.49,14.078 7.574,13.525 8.612,12.889 9.597,12.174 10.522,11.383 11.383,10.522 12.174,9.597 12.889,8.612 13.525,7.574 14.078,6.49 14.543,5.365 14.919,4.208 15.204,3.024 15.394,1.822 15.49,0.609 15.49,0 15.49,-0.609 15.394,-1.822 15.204,-3.024 14.919,-4.208 14.543,-5.365 14.078,-6.49 13.525,-7.574 12.889,-8.612 12.174,-9.597 11.383,-10.522 10.522,-11.383 9.597,-12.174 8.612,-12.889 7.574,-13.525 6.49,-14.078 5.365,-14.543 5.247,-14.582 5.247,-8.716 9.051,-4.911 9.082,-4.871 9.101,-4.825 9.108,-4.775 9.108,-3.799 11.684,-3.799 11.734,-3.792 11.761,-3.781 11.78,-3.773 11.82,-3.743 13.42,-2.142 13.451,-2.103 13.47,-2.056 13.476,-2.007 13.476,2.159 13.47,2.209 13.459,2.236 13.451,2.255 13.42,2.295 12.302,3.412 12.263,3.443 12.243,3.451 12.216,3.462 12.167,3.469 6.201,3.469 1.685,7.984 1.645,8.015 1.626,8.023 1.599,8.034 1.549,8.041 -5.624,8.041 -5.624,9.906 -5.631,9.956 -5.642,9.983 -5.65,10.002 -5.681,10.042 -8.56,12.921 -7.574,13.525 -6.49,14.078 -5.365,14.543 -4.208,14.919 -3.024,15.204 -1.822,15.394 -0.609,15.49 0.609,15.49
GND on POWER (split plane): 1.379,3.607 0.229,3.607 0.229,3.937 -0.737,3.937 -0.737,3.607 -2.184,3.607 -2.184,3.251 -2.337,3.251 -2.337,3.073 -2.616,3.073 -2.616,2.794 -2.87,2.794 -2.87,2.515 -3.124,2.515 -3.124,2.108 -3.429,2.108 -3.429,1.6 -3.759,1.6 -3.759,-1.346 -3.632,-1.346 -3.632,-1.753 -3.429,-1.753 -3.429,-2.134 -3.2,-2.134 -3.2,-2.464 -2.946,-2.464 -2.946,-2.769 -2.54,-2.769 -2.54,-3.023 -2.337,-3.023 -2.337,-3.251 -1.93,-3.251 -1.93,-3.632 -1.27,-3.632 -1.27,-3.861 1.041,-3.861 1.041,-3.632 1.651,-3.632 1.651,-3.48 1.981,-3.48 1.981,-3.251 2.337,-3.251 2.337,-2.997 2.642,-2.997 2.642,-2.769 2.946,-2.769 2.946,-2.388 3.099,-2.388 3.099,-2.21 3.378,-2.21 3.378,-1.778 3.556,-1.778 3.556,-1.549 3.632,-1.549 3.632,-1.067 3.835,-1.067 3.835,1.143 3.835,1.151 8.723,-3.737 8.723,-4.696 4.919,-8.5 4.888,-8.54 4.88,-8.559 4.869,-8.586 4.862,-8.636 4.862,-14.707 4.208,-14.92 3.024,-15.204 1.822,-15.394 0.609,-15.49 -0.609,-15.49 -1.822,-15.394 -3.024,-15.204 -4.208,-14.92 -5.365,-14.543 -6.49,-14.078 -7.574,-13.525 -7.662,-13.471 -1.845,-7.654 -1.815,-7.614 -1.807,-7.595 -1.796,-7.568 -1.789,-7.518 -1.789,-5.918 -1.796,-5.868 -1.815,-5.822 -1.845,-5.782 -2.303,-5.325 -2.342,-5.295 -2.362,-5.287 -2.389,-5.275 -2.438,-5.269 -5.432,-5.269 -9.262,-1.439 -9.302,-1.408 -9.321,-1.4 -9.348,-1.389 -9.398,-1.383 -9.79,-1.383 -9.79,2.791 -9.191,3.389 -7.417,3.389 -7.367,3.396 -7.34,3.407 -7.321,3.415 -7.281,3.446 -6.367,4.36 -6.336,4.4 -6.317,4.446 -6.31,4.496 -6.31,4.953 -6.31,5.675 -0.689,5.675
12V on POWER (split plane): -6.009,9.826 -6.009,8.381 -6.029,8.365 -6.353,8.041 -8.915,8.041 -9.423,8.041 -9.473,8.034 -9.519,8.015 -9.559,7.984 -9.966,7.578 -9.996,7.538 -10.004,7.519 -10.015,7.492 -10.022,7.442 -10.022,6.452 -10.015,6.402 -10.004,6.375 -9.996,6.356 -9.966,6.316 -9.709,6.06 -10.439,6.06 -10.489,6.053 -10.535,6.034 -10.575,6.003 -11.49,5.089 -11.52,5.049 -11.528,5.03 -11.539,5.003 -11.546,4.953 -11.546,4.042 -13.903,1.685 -13.933,1.645 -13.941,1.626 -13.952,1.599 -13.959,1.549 -13.959,0.559 -13.959,-2.032 -13.952,-2.082 -13.941,-2.109 -13.933,-2.128 -13.903,-2.168 -13.293,-2.777 -13.253,-2.808 -13.207,-2.827 -13.157,-2.834 -11.049,-2.834 -10.999,-2.827 -10.972,-2.816 -10.953,-2.808 -10.913,-2.777 -9.903,-1.767 -9.478,-1.767 -5.784,-5.461 -10.982,-10.659 -11.012,-10.699 -11.02,-10.718 -11.031,-10.745 -11.038,-10.795 -11.038,-10.868 -11.383,-10.522 -12.174,-9.597 -12.889,-8.612 -13.525,-7.574 -14.078,-6.49 -14.543,-5.365 -14.92,-4.208 -15.204,-3.024 -15.394,-1.822 -15.49,-0.609 -15.49,0 -15.49,0.609 -15.394,1.822 -15.204,3.024 -14.92,4.208 -14.543,5.365 -14.078,6.49 -13.525,7.574 -12.889,8.612 -12.174,9.597 -11.383,10.522 -10.522,11.383 -9.597,12.174 -8.878,12.696
OUT2 on POWER (split plane): -6.695,4.953 -6.695,4.575 -7.496,3.774 -9.271,3.774 -9.321,3.767 -9.348,3.756 -9.367,3.748 -9.407,3.717 -10.118,3.006 -10.149,2.966 -10.157,2.947 -10.168,2.92 -10.174,2.87 -10.174,-1.495 -11.129,-2.449 -13.078,-2.449 -13.575,-1.952 -13.575,0.559 -13.575,1.47 -11.218,3.827 -11.187,3.866 -11.168,3.913 -11.162,3.962 -11.162,4.873 -10.36,5.675 -9.246,5.675 -6.695,5.675
VBAT on POWER (split plane): -2.173,-5.998 -2.173,-7.439 -7.999,-13.265 -8.612,-12.889 -9.597,-12.174 -10.522,-11.383 -10.654,-11.252 -10.654,-10.875 -5.432,-5.653 -2.518,-5.653

## Keep-outs
Keep-Out Layer:
  circle w0.1: c0,0 r16

## Other copper
GND (plane layer: these items are gaps in the copper):
  rectangle: -3.962,-4.013 4.064,4.039
  lines w0.381: -3.429,1.372 -5.08,1.372 -5.613,1.905 -5.613,4.902 -5.613,12.04 -4.775,12.878 -4.14,13.513 -2.692,13.513 -2.108,12.929 -2.108,11.811 -2.108,5.74 1.346,5.74 2.134,4.953 2.134,3.759
  text "JLCJLCJLCJLC" at 4.496,-8.738 h0.8
POWER (plane layer: these items are gaps in the copper):
  rectangle: 2.464,-2.388 3.099,-1.956
  rectangle: 2.946,-2.388 3.099,-2.108
  rectangle: 3.277,-1.778 3.556,-1.346
  rectangle: -2.54,-3.023 -2.235,-2.616
  rectangle: -3.2,-2.464 -2.921,-1.956
  rectangle: -3.632,-1.753 -3.353,-1.143
  rectangle: -2.616,2.743 -2.184,3.073
  rectangle: -3.124,2.032 -2.692,2.515
  rectangle: -0.737,3.556 0.229,3.937
  rectangle: 3.277,1.143 3.835,1.727
  rectangle: 3.175,-1.549 3.632,-0.813
  rectangle: 1.473,-3.48 1.981,-3.124
  rectangle: 2.261,-2.997 2.642,-2.108
  rectangle: -1.27,-3.861 1.041,-3.505
  rectangle: -1.93,-3.632 1.651,-2.972
  rectangle: -3.759,-1.346 -3.353,1.6
  rectangle: 3.2,-1.067 3.835,1.143
  rectangle: 2.261,-2.769 2.946,-2.108
  rectangle: -2.946,-2.769 -2.21,-2.032
  rectangle: -2.87,2.007 -2.286,2.794
  rectangle: 1.956,1.93 2.896,2.87
  rectangle: -2.184,3.073 1.727,3.607
  rectangle: 2.032,-2.21 3.378,2.159
  rectangle: -3.429,-2.134 -1.956,2.108
  rectangle: -2.337,-3.251 2.337,3.251
  lines w0.381: -10.846,-11.481 -10.846,-10.795 -5.512,-5.461 ; -8.788,12.878 -5.817,9.906 -5.817,7.976 ; -7.976,-13.513 -1.981,-7.518 -1.981,-5.918 -2.438,-5.461 -5.512,-5.461 ; -7.417,5.867 -10.439,5.867 -11.354,4.953 -11.354,3.962 -13.767,1.549 -13.767,0.559 -13.767,-2.032 -13.157,-2.642 -11.049,-2.642 -9.982,-1.575 ; -6.502,5.791 -6.502,4.953 -6.502,4.496 -7.417,3.581 -9.271,3.581 -9.982,2.87 -9.982,-1.575 ; -6.248,7.874 -5.893,8.23 ; 5.055,-14.834 5.055,-8.636 8.915,-4.775 8.915,-3.658 -0.61,5.867 -8.052,5.867 -9.246,5.867 -9.83,6.452 -9.83,7.442 -9.423,7.849 -8.915,7.849 1.549,7.849 6.121,3.277 10.82,3.277 12.167,3.277 13.284,2.159 13.284,-2.007 11.684,-3.607 11.405,-3.607 8.865,-3.607 ; -9.982,-1.575 -9.398,-1.575 ; -9.982,-1.575 -9.398,-1.575 ; -9.398,-1.575 -5.512,-5.461

## Text inside footprints (layer, text, board x,y; h text height)
C13: Bottom Overlay "+" at -5.746,-4.367 h1
C18: Bottom Overlay "+" at -13.914,5.412 h1 r242